# Altium PCB EVB-A32S1-M_PCB.PcbDoc (part 3 of 3)
Units mm, origin at the board's own origin, x right, y up, seen from the top; angles counter-clockwise.
Board outline 134 x 65 mm, 4 copper layers (L1 (Signal), L2 (GND), L3 (PWR), L4 (Signal)), stack 1.614 mm thick; 111 components, 86 nets, 411 pads, 377 vias.
Unrouted connection lines stored in the file: 3.
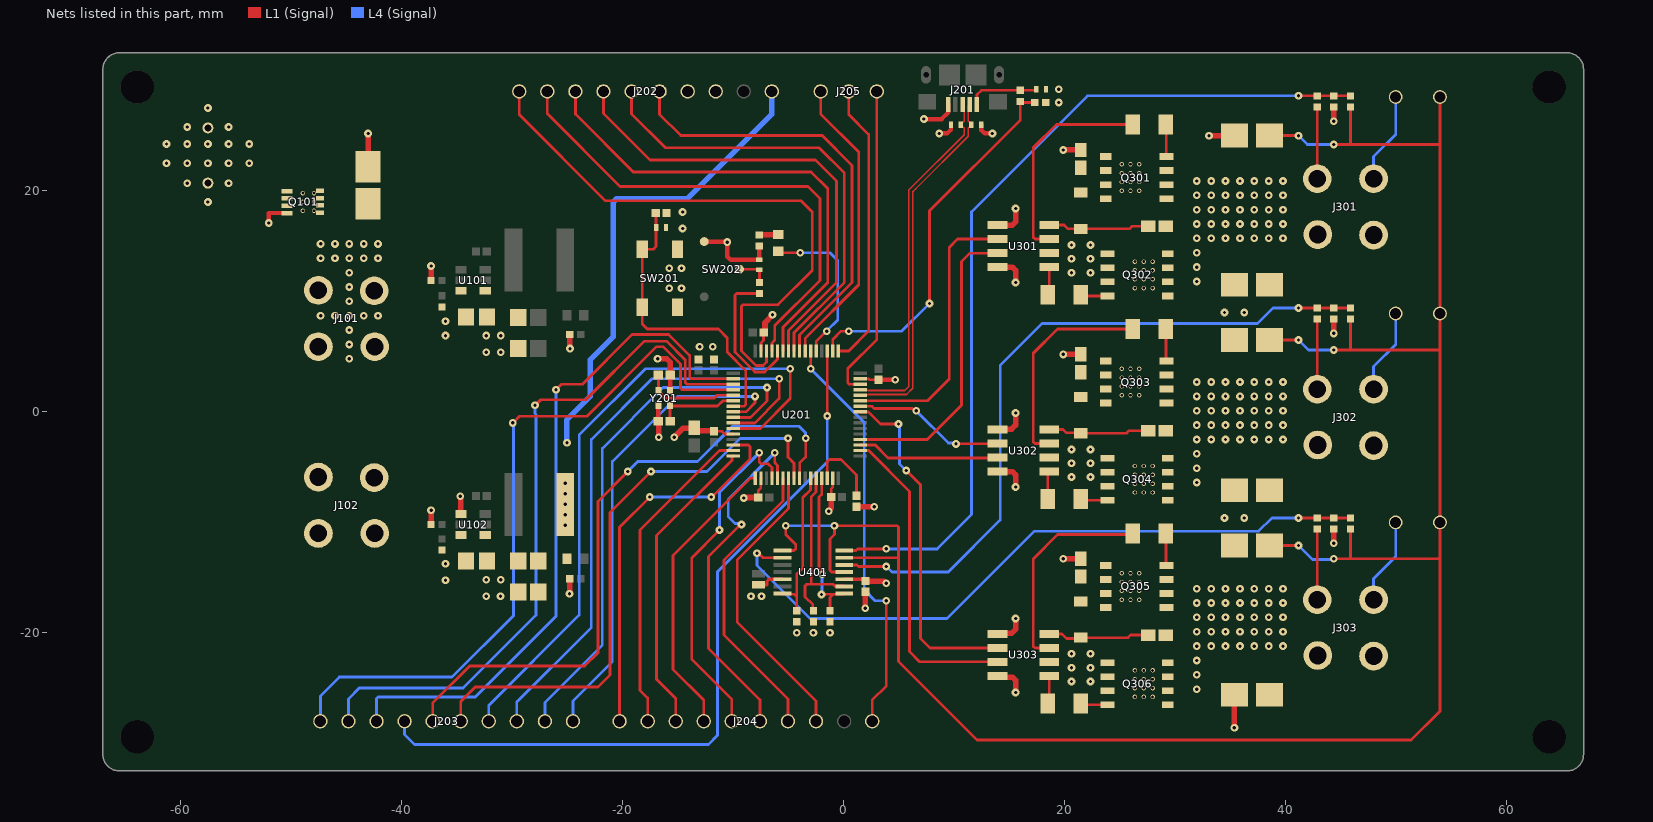
[diagram p4: the nets of this part, all layers, seen from the top]

## Via types
v1: diameter 0.7, hole 0.3, L1 (Signal) to L4 (Signal), tented top, 299 vias
v2: diameter 0.4, hole 0.25, L1 (Signal) to L4 (Signal), tented top, 78 vias

## Nets (pads, with @x,y where several pads share a name; then routed paths per layer and width w, separated by ;. In a path a pad name is that pad's centre, name@x,y a point inside that pad or via, vN(x,y) a via of type N, cw(c..) or ccw(c..) an arc to the next point about the centre after c; other vN are vias at no path point) (continued)
+5V: C107.2 C108.2 C401.2 D102.2 J202.1 L102.2 R401.2 R402.2 R403.2 U102.1 U401.3 | length 49
  L1 (Signal) w0.35: U401.3@0.1,-15.15 2,-15.15 C401.2@2,-15.31
  L1 (Signal) w0.5: v1(-34.671,-7.629) -34.671,-7.683 -34.6,-7.754 -34.6,-9.15 U102.1@-34.6,-9.25 ; C401.2@2,-15.31 3.656,-15.31 3.846,-15.5 v1(3.9,-15.5)
  L4 (Signal) w0.5: v1(-25,-2.8) -25.038,-2.762 -25.038,-0.738 -22.9,1.4 -22.9,4.7 -20.8,6.8 -20.8,19.007 -20.507,19.3 -14.1,19.3 -6.46,26.94 J202.1@-6.46,29
  other v1: -4.2,-20 -2.7,-20 -1.2,-20 -25.15,-10.25 -25.15,-9.3 -25.15,-8.35 -25.15,-7.4 -25.15,-6.45
+VBAT: D103.1 J101.1 J101.2 J101.3 J101.4 Q101.5 Q101.6 Q101.7 Q101.8
  other v1: -44.7,4.8 -44.7,6.1 -44.7,7.4 -47.3,8.7 -46,8.7 -44.7,8.7 -43.4,8.7 -42.1,8.7 -44.7,10 -44.7,11.3 -44.7,12.6 -47.3,13.9 -46,13.9 -44.7,13.9 -43.4,13.9 -42.1,13.9 -47.3,15.2 -46,15.2 -44.7,15.2 -43.4,15.2 -42.1,15.2
  other v2: -48.9,18.2 -47.9,18.2 -48.9,19 -47.9,19 -48.9,19.8 -47.9,19.8
+VCC: C101.2 C105.2 C109.1 C301.2 C303.2 C305.2 D301.2 D302.2 D303.2 Q101.1 Q101.2 Q101.3 Q301.5 Q301.6 Q301.7 Q301.8 Q303.5 Q303.6 Q303.7 Q303.8 Q305.5 Q305.6 Q305.7 Q305.8 R101.2 R104.2 U101.3 U102.3 U301.1 U302.1 U303.1 | length 8.7
  L1 (Signal) w0.5: U303.1@13.96,-20.095 13.998,-20.057 15.232,-20.057 15.6,-19.689 v1(15.6,-18.7) ; U302.1@13.96,-1.595 13.992,-1.563 15.239,-1.563 15.6,-1.202 v1(15.6,-0.1) ; U301.1@13.96,16.905 15.307,16.905 15.6,17.198 v1(15.6,18.4)
  other v1: -36,-15.25 -36,-13.75 -36,6.9 -36,8.2 -57.5,19 -59.375,20.7 -55.625,20.7 -61.25,22.5 -59.375,22.5 -57.5,22.5 -55.625,22.5 -53.75,22.5 -61.25,24.25 -59.375,24.25 -57.5,24.25 -55.625,24.25 -53.75,24.25 -59.375,25.78 -55.625,25.78 -57.5,27.5
  other v2: 25.2,-17 26,-17 26.8,-17 25.2,-16.2 26,-16.2 26.8,-16.2 25.2,-15.4 26,-15.4 26.8,-15.4 25.2,-14.6 26,-14.6 26.8,-14.6 25.2,1.5 26,1.5 26.8,1.5 25.2,2.3 26,2.3 26.8,2.3 25.2,3.1 26,3.1 26.8,3.1 25.2,3.9 26,3.9 26.8,3.9 25.2,20 26,20 26.8,20 25.2,20.8 26,20.8 26.8,20.8 25.2,21.6 26,21.6 26.8,21.6 25.2,22.4 26,22.4 26.8,22.4
BEMF_A: R406.2 R411.2 R412.1 U401.7 | length 78.9
  L1 (Signal) w0.25: U401.7@0.1,-12.55 1.154,-12.55 1.304,-12.4 v1(3.9,-12.4) ; v1(41.2,28.6) R412.1@42.9,28.6 R411.2@44.4,28.6 R406.2@45.9,28.6
  L4 (Signal) w0.25: v1(3.9,-12.4) 8.5,-12.4 11.6,-9.3 11.6,18.1 22.1,28.6 v1(41.2,28.6)
BEMF_B: R407.2 R410.2 R413.1 U401.5 | length 64.2
  L1 (Signal) w0.25: U401.5@0.1,-13.85 1.249,-13.85 1.399,-14 v1(3.9,-14) ; v1(41.2,9.4) R413.1@42.9,9.4 R410.2@44.4,9.4 R407.2@45.9,9.4
  L4 (Signal) w0.25: v1(3.9,-14) 3.925,-14 4.425,-14.5 9.5,-14.5 14.2,-9.8 14.2,4.2 18,8 37.5,8 38.9,9.4 v1(41.2,9.4)
BEMF_C: R408.2 R409.2 R414.1 U401.9 | length 63
  L1 (Signal) w0.25: v1(-7.8,-12.8) -7.678,-12.8 -7.278,-13.2 U401.9@-5.5,-13.2 ; v1(41.2,-9.6) R414.1@42.9,-9.6 ; R414.1@42.9,-9.6 R409.2@44.4,-9.6 R408.2@45.9,-9.6
  L4 (Signal) w0.25: v1(-7.8,-12.8) -7.8,-13.9 -3,-18.7 9.4,-18.7 17.3,-10.8 37.6,-10.8 38.8,-9.6 v1(41.2,-9.6)
BOOT0: R201.2 U201.60 | length 13.3
  L1 (Signal) w0.25: R201.2@-7.588,10.712 -9.654,10.712 -9.8,10.566 -9.8,5.4 -8,3.6 -7.112,3.6 -5.955,4.757 -5.955,5.495 U201.60@-5.95,5.5
COM: D401.1 D402.1 D403.1 R406.1 R407.1 R408.1 TP401.1 TP402.1 TP403.1 U401.4 U401.6 U401.8 | length 201.7
  L1 (Signal) w0.25: U401.8@-5.5,-12.55 -4.446,-12.55 -4.3,-12.404 -4.3,-12 -5.2,-11.1 v1(-5.2,-10.3) ; U401.4@0.1,-14.5 -1.054,-14.5 -1.2,-14.354 -1.2,-11.5 -0.8,-11.1 v1(-0.8,-10.3) 4.854,-10.3 5,-10.446 5,-13.2 5,-22.6 12.1,-29.7 51.4,-29.7 54,-27.1 54,-13.154 ; U401.6@0.1,-13.2 4.854,-13.2 4.954,-13.2 ; D403.1@38.575,-12.1 v1(41.2,-12.1) ; D402.1@38.575,6.5 v1(41.2,6.5) ; D401.1@38.575,25 v1(41.2,25) ; v1(44.4,-13.3) 45.9,-13.3 ; v1(44.4,5.6) 45.9,5.6 ; v1(44.4,24.2) 45.9,24.2 ; R408.1@45.9,-10.6 45.9,-13.3 ; R407.1@45.9,8.4 45.9,5.6 ; R406.1@45.9,27.6 45.9,24.2 ; TP403.1@54,28.5 54,24.2 ; 45.9,-13.3 53.854,-13.3 54,-13.154 ; 45.9,5.6 54,5.6 ; 45.9,24.2 54,24.2 ; 54,-13.154 TP401.1@54,-10 54,5.6 ; 54,5.6 TP402.1@54,8.9 54,24.2
  L4 (Signal) w0.25: v1(-5.2,-10.3) v1(-0.8,-10.3) ; v1(41.2,-12.1) 42.464,-13.364 44.336,-13.364 v1(44.4,-13.3) ; v1(41.2,6.5) 42.1,5.6 v1(44.4,5.6) ; v1(41.2,25) 42,24.2 v1(44.4,24.2)
GHO_A: Q301.4 R301.2 | length 2.9
  L1 (Signal) w0.25: Q301.4@29.235,23.105 R301.2@29.235,26
  L1 (Signal) w0.5: R301.2@29.2,26 R301.2@29.235,26
GHO_B: Q303.4 R303.2 | length 2.9
  L1 (Signal) w0.25: R303.2@29.2,7.5 29.2,4.605 Q303.4@29.235,4.605
GHO_C: Q305.4 R305.2 | length 2.9
  L1 (Signal) w0.25: R305.2@29.2,-11 29.2,-13.86 Q305.4@29.235,-13.895
GLO_A: Q302.4 R302.2 | length 2.5
  L1 (Signal) w0.25: R302.2@21.5,10.495 Q302.4@23.915,10.495
  L1 (Signal) w0.5: R302.2@21.5,10.495 R302.2@21.5,10.6
GLO_B: Q304.4 R304.2 | length 2.5
  L1 (Signal) w0.25: R304.2@21.5,-7.9 21.605,-8.005 Q304.4@23.915,-8.005
GLO_C: Q306.4 R306.2 | length 2.5
  L1 (Signal) w0.25: R306.2@21.5,-26.4 21.605,-26.505 Q306.4@23.915,-26.505
GND: C101.1 C103.1 C104.1 C105.1 C107.1 C108.1 C109.2 C201.1 C202.1 C203.1 C204.1 C205.1 C206.1 C207.1 C208.1 C209.1 C210.1 C211.1 C212.1 C301.1 C303.1 C305.1 C401.1 D103.2 D201.2 D202.2 D204.2 D205.2 D206.2 D304.2 D305.2 D306.2 D401.2 D402.2 D403.2 J102.1 J102.2 J102.3 J102.4 J201.5 J202.3 J202.4 Q101.4 Q302.1 Q302.2 Q302.3 Q304.1 Q304.2 Q304.3 Q306.1 Q306.2 Q306.3 R102.1 R103.1 R105.1 R106.1 R202.1 R203.1 R404.1 R405.1 R409.1 R410.1 R411.1 SW201.3 SW201.4 SW202.1 U101.4 U102.4 U201.12 U201.18 U201.31 U201.47 U201.63 U301.4 U302.4 U303.4 U401.12 Y201.2 Y201.4 | length 79.1
  L1 (Signal) w0.25: C202.1@-11.7,-1.76 -10.965,-1.76 -10.73,-1.995 -9.955,-1.995 U201.12@-9.95,-2 ; C204.1@-7.69,-7.75 -7.69,-7.11 -7.455,-6.875 -7.455,-6.005 U201.18@-7.45,-6 ; U201.63@-7.45,5.5 -7.445,5.505 -7.445,6.243 -7.21,6.478 C205.1@-7.21,7.2 ; C206.1@-1.09,-7.7 -1.09,-6.965 -0.955,-6.83 -0.955,-6.005 U201.31@-0.95,-6 ; U201.47@1.55,3 1.555,2.995 2.293,2.995 2.378,2.91 C207.1@3.2,2.91
  L1 (Signal) w0.3: R404.1@-7.4,-15.65 -6.9,-15.65 -6.9,-15.326 -6.724,-15.15 U401.12@-5.5,-15.15
  L1 (Signal) w0.4: v1(-52,17.1) -52,17.995 Q101.4@-50.335,17.995 ; C211.1@-16.75,-0.85 -16.737,-0.838 -16.737,0.563 Y201.2@-16.725,0.575 ; Y201.4@-15.675,1.925 -15.662,1.937 -15.662,3.338 C210.1@-15.65,3.35 ; SW202.1@-12.588,15.412 -12.563,15.387 v1@-10.513,15.387 ; v1(-10.488,15.362) -10.488,14.055 -10.195,13.762 D202.2@-7.6,13.762 ; R202.1@-7.6,15 D202.2@-7.6,13.762 ; D202.2@-7.588,13.762 D202.2@-7.6,13.762 ; C207.1@3.2,2.91 4.7,2.91 v1(4.7,2.9) ; v1(7.3,26.5) 8.9,26.5 9.5,27.1 J201.5@9.5,27.825 ; v1(8.7,25.2) 9.4,25.2 9.75,25.55 D206.2@9.75,26 ; D205.2@12.5,26 12.5,25.5 12.8,25.2 v1(13.5,25.2)
  L1 (Signal) w0.5: D103.2@-43,22.175 v1(-43,25.2) ; R105.1@-37.3,-10.2 v1(-37.3,-8.9) ; R102.1@-37.3,11.9 v1(-37.3,13.2) ; v1(-24.775,-16.45) -24.762,-16.437 -24.762,-15.112 R106.1@-24.75,-15.1 ; R103.1@-24.75,7 -24.75,5.725 v1(-24.725,5.725) ; v1(-16.8,4.8) -16.793,4.793 -15.968,4.793 -15.675,4.5 -15.675,3.5 -15.65,3.475 C210.1@-15.65,3.35 ; C211.1@-16.75,-0.85 -16.7,-0.9 v1@-16.7,-2.4 ; v1(-15.3,-2.3) -14.482,-1.482 -13.532,-1.482 C201.1@-13.5,-1.45 -13.25,-1.7 -11.76,-1.7 C202.1@-11.7,-1.76 ; v1(-9,-7.8) -9,-7.75 C204.1@-7.69,-7.75 ; C205.1@-7.21,7.2 -7.1,7.31 -7.08,7.31 -7.08,8.066 -6.4,8.746 v1(-6.4,8.8) ; v1(-1.3,-9) -1.3,-8.946 -1.09,-8.736 C206.1@-1.09,-7.7 ; C212.1@1.2,-8.59 2.8,-8.59 v1(2.8,-8.6) ; v1(2,-17.765) C401.1@2,-16.29 ; U303.4@13.96,-23.905 14.07,-24.015 15.307,-24.015 15.6,-24.308 v1(15.6,-25.4) ; U302.4@13.96,-5.405 15.307,-5.405 15.6,-5.698 v1(15.6,-6.8) ; U301.4@13.96,13.095 15.307,13.095 15.6,12.802 v1(15.6,11.7) ; v1(19.9,-13.3) C305.1@21.5,-13.3 ; v1(19.9,5.2) C303.1@21.5,5.2 ; v1(19.9,23.7) C301.1@21.5,23.7 ; v1(33.1,25) D401.2@35.425,25 ; v1(35.4,-28.6) 35.4,-25.625 D306.2@35.425,-25.6 ; v1(44.4,-11.9) R409.1@44.4,-10.6 ; v1(44.4,7.1) R410.1@44.4,8.4 ; v1(44.4,26.3) R411.1@44.4,27.6
  other v1: 22.375,-24.4 22.375,-23.15 22.375,-21.9 -32.3,-16.7 -8.355,-16.7 -7.4,-16.7 -31.02,-16.68 -32.3,-15.2 -31,-15.2 34.5,-9.6 36.3,-9.6 22.375,-5.9 22.375,-4.65 22.375,-3.4 -16.7,-2.3 -32.3,5.4 -31,5.4 -13,5.9 -11.8,5.9 -32.3,6.9 -31,6.9 34.5,9 36.3,9 -15.738,11.188 -14.638,11.188 22.375,12.6 -15.738,12.988 -14.638,12.988 22.375,13.85 22.375,15.1 -14.538,16.588 -14.538,18.088 19.5,28 19.5,29.2
HIN_A: U201.43 U301.2 | length 25.4
  L1 (Signal) w0.25: U201.43@1.55,1 7.6,1 9.6,3 9.6,14.9 10.335,15.635 U301.2@13.96,15.635
HIN_B: U201.42 U302.2 | length 13.8
  L1 (Signal) w0.25: U201.42@1.55,0.5 2.6,0.5 2.8,0.3 6.278,0.3 6.478,0.1 v1(6.6,0.1) ; v1(10.2,-2.9) 10.218,-2.882 13.942,-2.882 U302.2@13.96,-2.865
  L4 (Signal) w0.25: v1(6.6,0.1) 9.514,-2.814 10.114,-2.814 v1(10.2,-2.9)
HIN_C: U201.41 U303.2 | length 31.5
  L1 (Signal) w0.25: U201.41@1.555,-0.005 2.293,-0.005 3.388,-1.1 v1(5,-1.1) ; v1(5.7,-5.3) 7,-6.6 7,-20.5 7.865,-21.365 U303.2@13.96,-21.365
  L4 (Signal) w0.25: v1(5,-1.1) 5.085,-1.185 5.085,-4.713 5.672,-5.3 v1(5.7,-5.3)
HO_A: R301.1 U301.7 | length 19.5
  L1 (Signal) w0.25: U301.7@18.64,15.635 17.365,15.635 17.2,15.8 17.2,23.9 19.3,26 R301.1@26.2,26
HO_B: R303.1 U302.7 | length 19.4
  L1 (Signal) w0.25: U302.7@18.64,-2.865 17.346,-2.865 17.2,-2.719 17.2,5.3 19.4,7.5 R303.1@26.2,7.5
HO_C: R305.1 U303.7 | length 19.1
  L1 (Signal) w0.25: U303.7@18.64,-21.365 17.346,-21.365 17.2,-21.219 17.2,-13.3 19.4,-11.1 R305.1@26,-11.1
LIN_A: U201.36 U301.3 | length 27
  L1 (Signal) w0.25: U201.36@1.55,-2.5 7.6,-2.5 10.7,0.6 10.7,9.7 10.7,13.6 11.465,14.365 U301.3@13.96,14.365
LIN_B: U201.35 U302.3 | length 12.9
  L1 (Signal) w0.25: U201.35@1.55,-3 2.9,-3 4.067,-4.167 13.927,-4.167 U302.3@13.96,-4.135
LIN_C: U201.34 U303.3 | length 28.8
  L1 (Signal) w0.25: U201.34@1.55,-3.5 1.555,-3.505 2.305,-3.505 6,-7.2 6,-21.7 6.917,-22.617 13.942,-22.617 U303.3@13.96,-22.635
LO_A: R302.1 U301.5 | length 2.6
  L1 (Signal) w0.25: R302.1@18.5,10.6 18.64,10.6 U301.5@18.64,13.095
LO_B: R304.1 U302.5 | length 2.6
  L1 (Signal) w0.25: R304.1@18.5,-7.9 18.5,-5.545 U302.5@18.64,-5.405
LO_C: R306.1 U303.5 | length 2.6
  L1 (Signal) w0.25: R306.1@18.5,-26.4 18.64,-26.26 U303.5@18.64,-23.905
NRST: C209.2 D201.1 SW201.1 SW201.2 U201.7 | length 27.3
  L1 (Signal) w0.25: C209.2@-16.978,17.988 -16.938,17.948 D201.1@-16.938,16.688 -16.938,14.962 -17.187,14.713 SW201.2@-18.188,14.713 SW201.1@-18.188,9.463 -18.188,7.946 -17.741,7.5 -11.3,7.5 -10.5,6.7 -10.5,5.4 -8.829,3.729 -8.829,0.646 -8.975,0.5 U201.7@-9.95,0.5
OSC_IN: C210.2 U201.5 Y201.1 | length 8.6
  L1 (Signal) w0.25: C210.2@-16.75,3.35 -16.725,3.325 Y201.1@-16.725,1.925 -16.725,1.875 -16.105,1.255 -11.645,1.255 -11.4,1.5 -11.1,1.5 U201.5@-9.95,1.5
OSC_OUT: C211.2 U201.6 Y201.3 | length 7.4
  L1 (Signal) w0.25: C211.2@-15.65,-0.85 -15.675,-0.825 Y201.3@-15.675,0.575 -15.625,0.525 -11.375,0.525 -10.905,0.995 -9.955,0.995 U201.6@-9.95,1
PA0: J204.1 U201.14 | length 34.6
  L1 (Signal) w0.25: J204.1@-20.24,-28 -20.24,-10.44 v1(-17.5,-7.7) ; v1(-11.935,-7.7) -11.877,-7.7 -8.446,-4.27 -8.446,-3.146 -8.593,-3 U201.14@-9.95,-3
  L4 (Signal) w0.25: v1(-17.5,-7.7) v1(-11.935,-7.7)
PA1: J204.2 U201.15 | length 29
  L1 (Signal) w0.25: J204.2@-17.7,-28 -17.7,-25.9 -18.4,-25.2 -18.4,-10.7 -11.2,-3.5 U201.15@-9.95,-3.5
PA2: J204.3 U201.16 | length 27.7
  L1 (Signal) w0.25: J204.3@-15.16,-28 -15.16,-25.94 -16.9,-24.2 -16.9,-11.2 -10.079,-4.379 -10.079,-4.025 -10.054,-4 U201.16@-9.95,-4
PA3: J204.4 U201.17 | length 26.5
  L1 (Signal) w0.25: J204.4@-12.62,-28 -12.62,-26.08 -15.4,-23.3 -15.4,-13 -8.4,-6 U201.17@-7.95,-6
PA4: J204.5 U201.20 | length 31.4
  L1 (Signal) w0.25: v1(-11.2,-10.7) -13.7,-13.2 -13.7,-22.4 -10.08,-26.02 J204.5@-10.08,-28 ; v1@-7.6,-3.8 -7.6,-4.554 -7.454,-4.7 -6.8,-4.7 -6.455,-5.045 -6.455,-5.995 U201.20@-6.45,-6
  L4 (Signal) w0.25: v1(-11.2,-10.7) -11.2,-7.3 v1(-7.6,-3.7)
PA5: J204.6 U201.21 | length 32.5
  L1 (Signal) w0.25: v1(-9.2,-10.2) -9.3,-10.2 -12.2,-13.1 -12.2,-21.4 -7.54,-26.06 J204.6@-7.54,-28 ; v1(-6.2,-3.7) -6.2,-4.6 -5.95,-4.85 U201.21@-5.95,-6
  L4 (Signal) w0.25: v1(-9.2,-10.2) -9.286,-10.114 -9.786,-10.114 -10.4,-9.5 -10.4,-7.9 v1(-6.2,-3.7)
PA6: J204.7 U201.22 | length 26.6
  L1 (Signal) w0.25: U201.22@-5.45,-6 -5.455,-6.005 -5.455,-8.055 -10.8,-13.4 -10.8,-20.2 -5,-26 J204.7@-5,-28
PA7: J204.8 U201.23 | length 26.9
  L1 (Signal) w0.25: U201.23@-4.945,-5.995 U201.23@-4.95,-6 -4.945,-6.005 -4.945,-8.745 -9.6,-13.4 -9.6,-19.02 -2.46,-26.16 J204.8@-2.46,-28
PB4: J202.5 U201.56 | length 40.2
  L1 (Signal) w0.25: J202.5@-16.62,29 -16.62,26.92 -14.7,25 -1.9,25 0.8,22.3 0.8,11.7 -3.95,6.95 U201.56@-3.95,5.5
PB5: J202.6 U201.57 | length 41.5
  L1 (Signal) w0.25: J202.6@-19.16,29 -19.16,26.96 -16.1,23.9 -2.2,23.9 0.1,21.6 0.1,11.7 -4.445,7.155 -4.445,5.505 U201.57@-4.45,5.5
PB6: J202.7 U201.58 | length 42.8
  L1 (Signal) w0.25: J202.7@-21.7,29 -21.7,27 -17.5,22.8 -2.5,22.8 -0.6,20.9 -0.6,11.7 -4.945,7.355 -4.945,5.505 U201.58@-4.95,5.5
PB7: J202.8 U201.59 | length 44.1
  L1 (Signal) w0.25: J202.8@-24.24,29 -24.24,26.94 -19,21.7 -2.9,21.7 -1.4,20.2 -1.4,11.7 -5.445,7.655 -5.445,5.505 U201.59@-5.45,5.5
PB8: J202.9 U201.61 | length 45.5
  L1 (Signal) w0.25: J202.9@-26.78,29 -26.78,26.98 -20.2,20.4 -3.2,20.4 -2.1,19.3 -2.1,11.9 -6.2,7.8 -6.2,6.488 -6.445,6.243 -6.445,5.505 U201.61@-6.45,5.5
PB9: J202.10 U201.62 | length 53.3
  L1 (Signal) w0.25: J202.10@-29.32,29 -29.32,26.92 -21.5,19.1 -3.8,19.1 -2.8,18.1 -2.8,12.8 -5.9,9.7 -9.054,9.7 -9.2,9.554 -9.2,5.512 -7.888,4.2 -7.246,4.2 -6.95,4.496 U201.62@-6.95,5.5
PC0: J203.1 U201.8 | length 43.2
  L1 (Signal) w0.25: U201.8@-9.95,0 -9.945,0.005 -8.795,0.005 -7.978,0.822 v1(-7.978,1.4)
  L4 (Signal) w0.25: J203.1@-24.46,-28 -24.46,-26.16 -20.9,-22.6 -20.9,-4.5 -15,1.4 v1(-7.978,1.4)
PC1: J203.2 U201.9 | length 48.9
  L1 (Signal) w0.25: U201.9@-9.95,-0.5 -8.4,-0.5 -6.9,1 v1(-6.9,2.2)
  L4 (Signal) w0.25: J203.2@-27,-28 -27,-26.3 -21.8,-21.1 -21.8,-3.3 -16.3,2.2 v1(-6.9,2.2)
PC2: J203.3 U201.10 | length 54.4
  L1 (Signal) w0.25: U201.10@-9.95,-1 -8,-1 -5.8,1.2 v1(-5.8,3)
  L4 (Signal) w0.25: J203.3@-29.54,-28 -29.54,-26.24 -22.8,-19.5 -22.8,-2.5 -17.3,3 v1(-5.8,3)
PC3: J203.4 U201.11 | length 59.8
  L1 (Signal) w0.25: U201.11@-9.95,-1.5 -7.5,-1.5 -4.8,1.2 v1(-4.8,3.9)
  L4 (Signal) w0.25: J203.4@-32.08,-28 -32.08,-26.58 -23.9,-18.4 -23.9,-2.1 -17.9,3.9 v1(-4.8,3.9)
PC4: J203.5 U201.24 | length 53.7
  L1 (Signal) w0.25: J203.5@-34.62,-28 -34.62,-26.22 -33.3,-24.9 -22.2,-24.9 -21.1,-23.8 -21.1,-9.1 v1(-17.4,-5.4) ; v1(-5,-2.4) -5,-4.1 -4.445,-4.655 -4.445,-5.995 U201.24@-4.45,-6
  L4 (Signal) w0.25: v1(-17.4,-5.4) -12.335,-5.4 -9.335,-2.4 v1(-5,-2.4)
PC5: J203.6 U201.25 | length 58.4
  L1 (Signal) w0.25: J203.6@-37.16,-28 -37.16,-26.36 -33.8,-23 -23.4,-23 -22.2,-21.8 -22.2,-8.1 v1(-19.5,-5.4) ; U201.25@-3.95,-6 -3.945,-5.995 -3.945,-4.645 -3.4,-4.1 v1(-3.4,-2.4)
  L4 (Signal) w0.25: v1(-19.5,-5.4) -18.6,-4.5 -13.2,-4.5 -10,-1.3 -4,-1.3 -3.413,-1.887 -3.413,-2.387 v1(-3.4,-2.4)
PC10: J203.7 U201.51 | length 69.1
  L1 (Signal) w0.25: v1(-1.45,-0.38) U201.51@-1.45,5.5
  L4 (Signal) w0.25: J203.7@-39.7,-28 -39.7,-29.2 -38.8,-30.1 -12.2,-30.1 -11.4,-29.3 ; -11.4,-14.5 -1.45,-4.55 v1(-1.45,-0.38) ; -11.39,-29.3 -11.39,-14.5
PC13: J203.8 U201.2 | length 62.8
  L1 (Signal) w0.25: v1(-26,2) -25.5,2.5 -23.6,2.5 -19.1,7 -15.8,7 -13.9,5.1 -13.9,3.146 -13.754,3 U201.2@-9.95,3
  L4 (Signal) w0.25: J203.8@-42.24,-28 -42.24,-25.946 -42.094,-25.8 -33.3,-25.8 -26,-18.5 v1(-26,2)
PC14: J203.9 U201.3 | length 64.4
  L1 (Signal) w0.25: v1(-27.9,0.6) -27.875,0.6 -27.375,1.1 -23.3,1.1 -18,6.4 -16,6.4 -14.3,4.7 -14.3,2.646 -14.154,2.5 U201.3@-9.95,2.5
  L4 (Signal) w0.25: J203.9@-44.78,-28 -44.78,-25.98 -43.8,-25 -34.4,-25 -27.8,-18.4 -27.8,-0.25 -27.9,-0.15 v1(-27.9,0.6)
PC15: J203.10 U201.4 | length 65.9
  L1 (Signal) w0.25: v1(-29.9,-1) -29.3,-0.4 -23.2,-0.4 -16.9,5.9 -16.3,5.9 -14.729,4.329 -14.729,2.146 -14.582,2 U201.4@-9.95,2
  L4 (Signal) w0.25: J203.10@-47.32,-28 -47.32,-25.72 -45.602,-24.002 -35.402,-24.002 -29.85,-18.45 -29.85,-1.05 v1(-29.9,-1)
PD2: J204.10 U201.54 | length 37.5
  L1 (Signal) w0.25: U201.54@-2.95,5.5 -2.95,3.95 v1@-2.9,3.9 ; J204.10@2.62,-28 2.62,-26.08 3.9,-24.8 v1(3.9,-17.1)
  L4 (Signal) w0.25: v1(-2.95,3.9) 1.9,-0.95 1.9,-16.1 2.9,-17.1 v1(3.9,-17.1)
PHASE_A: C302.1 D304.1 J301.1 J301.2 J301.3 J301.4 Q301.1 Q301.2 Q301.3 Q302.5 Q302.6 Q302.7 Q302.8 R412.2 TP301.1 U301.6 | length 14.7
  L1 (Signal) w0.25: J301.4@42.9,21.1 R412.2@42.9,27.6
  L4 (Signal) w0.25: J301.3@48,21.1 48,23.1 50,25.1 TP301.1@50,28.5
  other v1: 32,11.8 20.65,12.6 32,13.1 20.65,13.85 32,14.4 20.65,15.1 32,15.7 33.3,15.7 34.6,15.7 35.9,15.7 37.2,15.7 38.5,15.7 39.8,15.7 32,17 33.3,17 34.6,17 35.9,17 37.2,17 38.5,17 39.8,17 32,18.3 33.3,18.3 34.6,18.3 35.9,18.3 37.2,18.3 38.5,18.3 39.8,18.3 32,19.6 33.3,19.6 34.6,19.6 35.9,19.6 37.2,19.6 38.5,19.6 39.8,19.6 32,20.9 33.3,20.9 34.6,20.9 35.9,20.9 37.2,20.9 38.5,20.9 39.8,20.9
  other v2: 26.4,11.2 27.2,11.2 28,11.2 26.4,12 27.2,12 28,12 26.4,12.8 27.2,12.8 28,12.8 26.4,13.6 27.2,13.6 28,13.6
PHASE_B: C304.1 D305.1 J302.1 J302.2 J302.3 J302.4 Q303.1 Q303.2 Q303.3 Q304.5 Q304.6 Q304.7 Q304.8 R413.2 TP302.1 U302.6 | length 14
  L1 (Signal) w0.25: J302.4@42.9,2.05 R413.2@42.9,8.4
  L4 (Signal) w0.25: J302.3@48,2.05 48,4.1 50,6.1 TP302.1@50,8.9
  other v1: 32,-6.4 20.65,-5.9 32,-5.1 20.65,-4.65 32,-3.8 20.65,-3.4 32,-2.5 33.3,-2.5 34.6,-2.5 35.9,-2.5 37.2,-2.5 38.5,-2.5 39.8,-2.5 32,-1.2 33.3,-1.2 34.6,-1.2 35.9,-1.2 37.2,-1.2 38.5,-1.2 39.8,-1.2 32,0.1 33.3,0.1 34.6,0.1 35.9,0.1 37.2,0.1 38.5,0.1 39.8,0.1 32,1.4 33.3,1.4 34.6,1.4 35.9,1.4 37.2,1.4 38.5,1.4 39.8,1.4 32,2.7 33.3,2.7 34.6,2.7 35.9,2.7 37.2,2.7 38.5,2.7 39.8,2.7
  other v2: 26.4,-7.3 27.2,-7.3 28,-7.3 26.4,-6.5 27.2,-6.5 28,-6.5 26.4,-5.7 27.2,-5.7 28,-5.7 26.4,-4.9 27.2,-4.9 28,-4.9
PHASE_C: C306.1 D306.1 J303.1 J303.2 J303.3 J303.4 Q305.1 Q305.2 Q305.3 Q306.5 Q306.6 Q306.7 Q306.8 R414.2 TP303.1 U303.6 | length 14.2
  L1 (Signal) w0.25: J303.4@42.9,-17 R414.2@42.9,-10.6
  L4 (Signal) w0.25: J303.3@48,-17 48,-15.1 50,-13.1 TP303.1@50,-10
  other v1: 32,-25.1 20.65,-24.4 32,-23.8 20.65,-23.15 32,-22.5 20.65,-21.9 32,-21.2 33.3,-21.2 34.6,-21.2 35.9,-21.2 37.2,-21.2 38.5,-21.2 39.8,-21.2 32,-19.9 33.3,-19.9 34.6,-19.9 35.9,-19.9 37.2,-19.9 38.5,-19.9 39.8,-19.9 32,-18.6 33.3,-18.6 34.6,-18.6 35.9,-18.6 37.2,-18.6 38.5,-18.6 39.8,-18.6 32,-17.3 33.3,-17.3 34.6,-17.3 35.9,-17.3 37.2,-17.3 38.5,-17.3 39.8,-17.3 32,-16 33.3,-16 34.6,-16 35.9,-16 37.2,-16 38.5,-16 39.8,-16
  other v2: 26.4,-25.8 27.2,-25.8 28,-25.8 26.4,-25 27.2,-25 28,-25 26.4,-24.2 27.2,-24.2 28,-24.2 26.4,-23.4 27.2,-23.4 28,-23.4
PROG_LED: D203.2 U201.53 | length 14.8
  L1 (Signal) w0.25: D203.2@-5.9,14.55 -5.75,14.4 v1(-3.9,14.4) ; U201.53@-2.45,5.5 -2.45,6.35 v1(-1.5,7.3)
  L4 (Signal) w0.25: v1(-3.9,14.4) -1.2,14.4 -0.5,13.7 -0.5,8.3 v1(-1.5,7.3)
PROG_LED_K: D203.1 R202.2 | length 1.7
  L1 (Signal) w0.5: R202.2@-7.6,16 -7.575,16.025 -5.925,16.025 D203.1@-5.9,16.05
SENSE_A: R401.1 U201.29 U401.1 | length 14.5
  L1 (Signal) w0.25: v1(-1.965,-16.535) -1.93,-16.5 -0.9,-16.5 ; U201.29@-1.95,-6 -1.955,-6.005 -1.955,-7.478 -2.2,-7.723 -2.2,-14.33 -1.907,-14.624 v1(-1.907,-14.702) ; R401.1@-1.2,-18 -1.2,-17.4 -1.2,-16.8 -0.9,-16.5 ; U401.1@0.1,-16.45 0.05,-16.5 -0.9,-16.5
  L4 (Signal) w0.25: v1(-1.965,-16.535) -1.933,-16.502 -1.933,-14.728 v1(-1.907,-14.702)
SENSE_B: R402.1 U201.28 U401.2 | length 15.9
  L1 (Signal) w0.25: -2.9,-15.5 -2.9,-7.7 -2.455,-7.255 -2.455,-6.005 U201.28@-2.45,-6 ; R402.1@-2.7,-18 -2.754,-17.946 -2.754,-17.446 -3.451,-16.749 -3.451,-15.744 -3.305,-15.598 -2.9,-15.598 -0.915,-15.598 -0.763,-15.75 0.05,-15.75 U401.2@0.1,-15.8
SENSE_C: R403.1 U201.27 U401.14 | length 13.9
  L1 (Signal) w0.25: U401.14@-5.5,-16.45 -5.45,-16.5 -4.446,-16.5 -4.2,-16.746 ; R403.1@-4.2,-18 -4.2,-16.746 ; U201.27@-2.95,-6 -2.955,-6.005 -2.955,-7.055 -3.67,-7.77 -3.67,-14.151 -4.2,-14.681 -4.2,-16.746
SW_BOOT0: D202.1 R201.1 SW202.2 | length 3
  L1 (Signal) w0.25: SW202.2@-9.388,12.912 -7.588,12.912 D202.1@-7.588,12.862 R201.1@-7.588,11.712
SW_CLK: J205.2 U201.49 | length 25.9
  L1 (Signal) w0.25: U201.49@-0.45,5.5 0.5,5.5 2.3,7.3 2.3,25.1 0.5,26.9 J205.2@0.5,29
SW_IO: J205.1 U201.46 | length 28.7
  L1 (Signal) w0.25: U201.46@1.55,2.5 0.546,2.5 0.4,2.646 0.4,3.9 3.04,6.54 J205.1@3.04,29
SW_O: J205.3 U201.55 | length 26.9
  L1 (Signal) w0.25: U201.55@-3.45,5.5 -3.445,5.505 -3.445,6.655 1.4,11.5 1.4,23.52 -2.04,26.96 J205.3@-2.04,29
USB_D_N: D205.1 J201.2 U201.44 | length 33.2
  L1 (Signal) w0.15: U201.44@1.55,1.5 1.605,1.555 2.272,1.555 2.282,1.565 5.732,1.565 6.3,2.133 6.3,19.927 6.545,20.172 11.31,24.937 11.31,25.687 11.398,25.775 11.475,25.775 11.6,25.9 D205.1@11.6,26 11.6,26.1 11.475,26.225 11.398,26.225 11.31,26.313 11.31,26.772 11.31,27.137 11.325,27.152 11.325,27.7 J201.2@11.45,27.825
USB_D_P: D206.1 J201.3 U201.45 | length 32.6
  L1 (Signal) w0.15: U201.45@1.55,2 1.605,1.945 2.272,1.945 2.282,1.935 5.578,1.935 5.93,2.287 5.93,20.08 6.175,20.325 10.94,25.09 10.94,25.687 10.852,25.775 10.775,25.775 10.65,25.9 D206.1@10.65,26 10.65,26.1 10.775,26.225 10.852,26.225 10.94,26.313 10.94,26.925 10.94,27.137 10.925,27.152 10.925,27.7 J201.3@10.8,27.825
VB_A: C302.2 D301.1 U301.8 | length 9.2
  L1 (Signal) w0.25: U301.8@18.64,16.905 19.995,16.905 20.335,16.565 D301.1@21.5,16.565 25.915,16.565 26.15,16.8 C302.2@27.6,16.8
VB_B: C304.2 D302.1 U302.8 | length 9.2
  L1 (Signal) w0.25: U302.8@18.64,-1.595 19.895,-1.595 20.2,-1.9 21.465,-1.9 D302.1@21.5,-1.935 25.635,-1.935 25.87,-1.7 C304.2@27.6,-1.7
VB_C: C306.2 D303.1 U303.8 | length 9.3
  L1 (Signal) w0.25: U303.8@18.64,-20.095 19.795,-20.095 20.2,-20.5 21.435,-20.5 D303.1@21.5,-20.435 25.765,-20.435 26,-20.2 C306.2@27.6,-20.2
VBUS: D204.1 J201.1 R204.2 | length 6.5
  L1 (Signal) w0.25: J201.1@12.1,27.825 12.115,27.84 12.115,28.715 12.5,29.1 R204.2@16.025,29.1 17.45,29.1 D204.1@17.45,29.2
VBUS_SENSE: R203.2 R204.1 U201.50 | length 34.2
  L1 (Signal) w0.25: U201.50@-0.95,5.5 -0.945,5.505 -0.945,6.555 -0.2,7.3 v1(0.5,7.3) ; v1(7.8,9.8) 7.8,18.2 16.025,26.425 R204.1@16.025,28.1 R204.1@16.215,27.91 ; R204.1@16.215,28 R203.2@17.325,28
  L4 (Signal) w0.25: v1(0.5,7.3) 5.3,7.3 v1(7.8,9.8)
VCAP: C212.2 U201.30 | length 6.8
  L1 (Signal) w0.25: U201.30@-1.45,-6 -1.45,-4.496 -1.254,-4.3 -0.2,-4.3 1.21,-5.71 C212.2@1.21,-7.7
pads on no net: J201.4 J201.6 J201.7 J201.8 J201.9 J201.10 J201.11 J204.9 U201.26 U201.33 U201.37 U201.38 U201.39 U201.40 U201.52 U401.13

## Polygon pours and split planes (outlines as drawn)
GND on L1 (Signal) "GND_L01_P030" (solid, pour order 30): -16.238,17.388 -15.364,17.388 -15.364,17.188 -16.238,17.188 -16.238,8.088 -13.738,8.088 -13.738,18.588 -16.238,18.588
GND on L1 (Signal) "GND_L01_P059" (solid, pour order 59): -9,-15.3 -7,-15.3 -7,-17.2 -9,-17.2
+5V on L1 (Signal) "+5V_L01_P057" (solid, pour order 57): -2.121,-18.6 -2.121,-18.873 -1.779,-18.873 -1.779,-18.6 -0.7,-18.6 -0.7,-20.5 -4.7,-20.5 -4.7,-18.6 -3.621,-18.6 -3.621,-18.873 -3.279,-18.873 -3.279,-18.6
GND on L1 (Signal) "GND_L01_P053" (solid, pour order 53): 33.946,-6.967 33.946,-12.227 33.946,-13.4 36.8,-13.4 36.8,-5.9 33.946,-5.9
PHASE_C on L1 (Signal) "PHASE_C_L01_P052" (solid, pour order 52): 17.7,-22.227 17.7,-23.027 20,-23.027 20,-24.927 21.3,-24.927 21.3,-21.427 20,-21.427 20,-22.227
GND on L1 (Signal) "GND_L01_P051" (solid, pour order 51): 24.6,-24.549 23.026,-24.549 23.026,-24.701 24.6,-24.701 24.6,-25.625 23.2,-25.625 23.2,-24.925 21.7,-24.925 21.7,-21.425 23.026,-21.425 23.026,-22.325 24.6,-22.325 24.6,-23.279 23.026,-23.279 23.026,-23.431 24.6,-23.431
+VCC on L1 (Signal) "+VCC_L01_P050" (solid, pour order 50): 21.373,-18.075 21.373,-17.849 21,-17.849 21,-16.475 21.373,-16.475 21.373,-15.775 20.6,-15.775 20.6,-14.075 22.2,-14.075 22.2,-14.742 22.289,-14.742 22.289,-13.741 23.006,-13.741 23.006,-13.375 24.6,-13.375 24.6,-14.429 23.006,-14.429 23.006,-14.575 24.6,-14.575 24.6,-15.675 23.006,-15.675 23.006,-15.851 24.6,-15.851 24.6,-16.969 23.006,-16.969 23.006,-17.135 24.6,-17.135 24.6,-18.075
PHASE_B on L1 (Signal) "PHASE_B_L01_P049" (solid, pour order 49): 17.7,-3.71 17.7,-4.51 20,-4.51 20,-6.41 21.3,-6.41 21.3,-2.91 20,-2.91 20,-3.71
GND on L1 (Signal) "GND_L01_P048" (solid, pour order 48): 24.6,-6.024 24.042,-6.024 24.042,-6.176 24.6,-6.176 24.6,-7.1 23.2,-7.1 23.2,-6.4 21.7,-6.4 21.7,-2.9 23.026,-2.9 23.026,-3.8 24.6,-3.8 24.6,-4.754 24.042,-4.754 24.042,-4.906 24.6,-4.906
+VCC on L1 (Signal) "+VCC_L01_P047" (solid, pour order 47): 24.52,3.894 23.006,3.894 23.006,4.059 24.52,4.059 24.52,5.095 23,5.095 23,4.775 22.3,4.775 22.3,3.725 21.851,3.725 21.851,4.395 20.52,4.395 20.52,2.695 21.35,2.695 21.35,1.995 20.92,1.995 20.92,0.621 21.35,0.621 21.35,0.395 24.52,0.395 24.52,1.335 23.006,1.335 23.006,1.506 24.52,1.506 24.52,2.624 23.006,2.624 23.006,2.795 24.52,2.795
PHASE_A on L1 (Signal) "PHASE_A_L01_P040" (solid, pour order 40): 29.05,11.054 30.144,11.054 30.144,11.212 29.05,11.212 29.05,12.325 30.144,12.325 30.144,12.476 29.05,12.476 29.05,13.6 30.144,13.6 30.144,13.746 29.05,13.746 29.05,16.2 28.5,16.2 28.5,17.4 29.05,17.4 29.05,18.9 28.5,18.9 28.5,19.6 29.1,19.6 29.1,20.2 28.6,20.2 28.6,20.9 29.1,20.9 29.1,21.5 28.6,21.5 28.6,22.2 50.7,22.2 50.61,14.525 33.4,14.525 33.4,10.1 29.05,10.1
PHASE_C on L1 (Signal) "PHASE_C_L01_P046" (solid, pour order 46): 37.3,-22.6 37.3,-26.7 39.8,-26.7 39.8,-22.6 50.609,-22.6 50.699,-14.9 28.6,-14.9 28.6,-15.525 29.1,-15.525 29.1,-16.125 28.6,-16.125 28.6,-16.825 29.1,-16.825 29.1,-17.425 28.5,-17.425 28.5,-18.125 29.05,-18.125 29.05,-19.625 28.5,-19.625 28.5,-20.825 29.05,-20.825 29.05,-23.279 30.144,-23.279 30.144,-23.425 29.05,-23.425 29.05,-24.549 30.144,-24.549 30.144,-24.7 29.05,-24.7 29.05,-25.813 30.144,-25.813 30.144,-25.971 29.05,-25.971 29.05,-27 33.4,-27 33.4,-22.6
PHASE_B on L1 (Signal) "PHASE_B_L01_P045" (solid, pour order 45): 37.3,-4 37.3,-8.2 39.8,-8.2 39.8,-4 50.61,-4 50.701,3.8 28.6,3.8 28.6,2.975 29.1,2.975 29.1,2.375 28.6,2.375 28.6,1.675 29.1,1.675 29.1,1.075 28.5,1.075 28.5,0.375 29.05,0.375 29.05,-1.125 28.5,-1.125 28.5,-2.325 29.05,-2.325 29.05,-4.779 30.144,-4.779 30.144,-4.925 29.05,-4.925 29.05,-6.049 30.144,-6.049 30.144,-6.2 29.05,-6.2 29.05,-7.312 30.144,-7.312 30.144,-7.471 29.05,-7.471 29.05,-8.425 33.4,-8.425 33.4,-4
PHASE_A on L1 (Signal) "PHASE_A_L01_P044" (solid, pour order 44): 17.7,14.8 17.7,14 20,14 20,12.1 21.3,12.1 21.3,15.6 20,15.6 20,14.8
+VCC on L1 (Signal) "+VCC_L01_P036" (solid, pour order 36): 21.373,18.9 21.373,19.126 21,19.126 21,20.5 21.373,20.5 21.373,21.2 20.6,21.2 20.6,22.9 22.2,22.9 22.2,22.233 22.289,22.233 22.289,23.234 23.006,23.234 23.006,23.6 24.6,23.6 24.6,22.546 23.006,22.546 23.006,22.4 24.6,22.4 24.6,21.3 23.006,21.3 23.006,21.124 24.6,21.124 24.6,20.006 23.006,20.006 23.006,19.84 24.6,19.84 24.6,18.9
GND on L1 (Signal) "GND_L01_P042" (solid, pour order 42): 24.6,12.476 24.042,12.476 24.042,12.324 24.6,12.324 24.6,11.4 23.2,11.4 23.2,12.1 21.7,12.1 21.7,15.6 23.026,15.6 23.026,14.7 24.6,14.7 24.6,13.746 24.042,13.746 24.042,13.594 24.6,13.594
PHASE_A on L1 (Signal) "PHASE_A_L01_P041" (solid, pour order 41): 37.3,10.4 39.8,10.4 39.8,14.7 37.3,14.7
GND on L1 (Signal) "GND_L01_P038" (solid, pour order 38): 33.946,11.633 33.946,6.373 33.946,5.2 36.8,5.2 36.8,12.7 33.946,12.7
GND on L1 (Signal) "GND_L01_P034" (solid, pour order 34): 18,28.579 18.9,28.579 18.9,28.8 18,28.8 18,29.7 20,29.7 20,27.5 18,27.5
GND on L1 (Signal) "GND_L01_P019" (solid, pour order 19): -13.5,4.6 -11.3,4.6 -11.3,6.4 -13.5,6.4
5V_BUCK_SW on L1 (Signal) "5V_BUCK_SW_L01_P018" (solid, pour order 18): -31.625,-8.64 -31.625,-8.1 -31.85,-8.1 -32.75,-8.1 -32.75,-7.2 -28.85,-7.2 -28.85,-10.6 -32.95,-10.6 -32.95,-9.8 -31.85,-9.8 -31.85,-8.64
+5V on L1 (Signal) "+5V_L01_P017" (solid, pour order 17): -26.292,-11.506 -26.59,-11.506 -26.59,-12.471 -26.684,-12.471 -26.684,-12.505 -27.863,-12.505 -27.863,-17.33 -25.679,-17.33 -25.679,-13.98 -24.488,-13.98 -24.488,-11.33 -24.088,-11.33 -24.088,-5.33 -26.292,-5.33
GND on L1 (Signal) "GND_L01_P016" (solid, pour order 16): -31.554,-11.75 -29.133,-11.75 -29.133,-17.35 -32.908,-17.35 -32.908,-10.8 -31.554,-10.8
+VCC on L1 (Signal) "+VCC_L01_P015" (solid, pour order 15): -35.771,-12.272 -35.771,-11.75 -35.15,-11.75 -35.15,-10.872 -33.35,-10.872 -33.35,-14.601 -35.125,-14.601 -35.125,-15.922 -36.8,-15.922 -36.8,-12.272
+VCC on L1 (Signal) "+VCC_L01_P008" (solid, pour order 8): -35.721,9.9 -35.721,10.346 -35.1,10.346 -35.1,11.3 -33.3,11.3 -33.3,7.571 -35.129,7.571 -35.129,6.25 -36.75,6.25 -36.75,9.9
3V3_BUCK_SW on L1 (Signal) "3V3_BUCK_SW_L01_P014" (solid, pour order 14): -31.8,13.886 -31.64,13.886 -31.64,13.46 -31.8,13.46 -31.8,12.3 -32.9,12.3 -32.9,11.5 -28.8,11.5 -28.8,14.9 -32.7,14.9 -32.7,14 -31.8,14
+3V3 on L1 (Signal) "+3V3_L01_P010" (solid, pour order 10): -26.596,9.575 -26.596,10.646 -26.204,10.646 -26.204,16.75 -24,16.75 -24,10.75 -24.4,10.75 -24.4,8.1 -25.675,8.1 -25.675,4.75 -27.775,4.75 -27.775,9.575
GND on L1 (Signal) "GND_L01_P009" (solid, pour order 9): -31.646,10.35 -29.225,10.35 -29.225,4.75 -33,4.75 -33,11.3 -31.646,11.3
+VCC on L1 (Signal) "+VCC_L01_P007" (solid, pour order 7): -49.8,20.2 -56.4,20.2 -56.4,18.5 -49.8,18.5
+VCC on L1 (Signal) "+VCC_L01_P006" (solid, pour order 6): -57.5,18.2 cw(c-57.5,23.2) -62.5,23.2 cw(c-57.5,23.2) -57.5,28.2 cw(c-57.5,23.2) -52.5,23.2 cw(c-57.5,23.2)
+VBAT on L1 (Signal) "+VBAT_L01_P000" (solid, pour order 0): -49.25,20.25 -49.25,3.25 -40.6,3.25 -40.6,20.25
PHASE_C on L4 (Signal) "PHASE_C_L04_P056" (solid, pour order 56): 28.6,-14.9 28.6,-19.3 20,-19.3 20,-27 33.4,-27 33.4,-22.6 40.9,-22.6 40.9,-14.9 33.4,-14.9
PHASE_B on L4 (Signal) "PHASE_B_L04_P055" (solid, pour order 55): 28.6,3.8 28.6,-0.6 20,-0.6 20,-8.3 33.4,-8.3 33.4,-3.9 40.9,-3.9 40.9,3.8 33.4,3.8
PHASE_A on L4 (Signal) "PHASE_A_L04_P054" (solid, pour order 54): 28.6,22.2 28.6,17.8 20,17.8 20,10.1 33.4,10.1 33.4,14.5 40.9,14.5 40.9,22.2 33.4,22.2
+3V3 on L3 (PWR) (split plane): 4.898,17 4.898,12.5 4.898,-10.398 -11.398,-10.398 -11.398,-7 -11.406,-6.961 -11.428,-6.928 -11.461,-6.906 -11.5,-6.898 -18.898,-6.898 -18.898,0.25 -18.906,0.289 -18.928,0.322 -18.961,0.344 -19,0.352 -30.898,0.352 -30.898,9.75 -30.906,9.789 -30.928,9.822 -30.961,9.844 -31,9.852 -35.898,9.852 -35.898,20.398 4.898,20.398
+5V on L3 (PWR) (split plane): -19.102,-7 -19.094,-7.039 -19.072,-7.072 -19.039,-7.094 -19,-7.102 -11.602,-7.102 -11.602,-10.5 -11.594,-10.539 -11.572,-10.572 -11.539,-10.594 -11.5,-10.602 4.898,-10.602 4.898,-11 4.898,-22.898 -30.648,-22.898 -30.648,-12.5 -30.656,-12.461 -30.678,-12.428 -30.711,-12.406 -30.75,-12.398 -35.898,-12.398 -35.898,-4.852 -31,-4.852 -30.961,-4.844 -30.928,-4.822 -30.906,-4.789 -30.898,-4.75 -30.898,0.148 -19.102,0.148
+VBAT on L3 (PWR) (split plane): -39.202,2.002 -50.798,2.002 -50.798,17.8 -50.798,21.498 -39.202,21.498
+VBAT on L3 (PWR) (split plane): 65.629,31.983 65.757,31.958 65.879,31.916 65.996,31.859 66.104,31.787 66.201,31.701 66.287,31.604 66.359,31.496 66.416,31.379 66.458,31.257 66.483,31.129 66.491,31.012 66.49,31 66.49,-31 66.491,-31.012 66.483,-31.129 66.458,-31.257 66.416,-31.379 66.359,-31.496 66.287,-31.604 66.201,-31.701 66.104,-31.787 65.996,-31.859 65.879,-31.916 65.757,-31.958 65.629,-31.983 65.512,-31.991 65.5,-31.99 -65.5,-31.99 -65.512,-31.991 -65.629,-31.983 -65.757,-31.958 -65.879,-31.916 -65.996,-31.859 -66.104,-31.787 -66.201,-31.701 -66.287,-31.604 -66.359,-31.496 -66.416,-31.379 -66.458,-31.257 -66.483,-31.129 -66.491,-31.012 -66.49,-31 -66.49,31 -66.491,31.012 -66.483,31.129 -66.458,31.257 -66.416,31.379 -66.359,31.496 -66.287,31.604 -66.201,31.701 -66.104,31.787 -65.996,31.859 -65.879,31.916 -65.757,31.958 -65.629,31.983 -65.512,31.991 -65.5,31.99 65.5,31.99 65.512,31.991
GND on L2 (GND) (split plane): 65.629,31.983 65.757,31.958 65.879,31.916 65.996,31.859 66.104,31.787 66.201,31.701 66.287,31.604 66.359,31.496 66.416,31.379 66.458,31.257 66.483,31.129 66.491,31.012 66.49,31 66.49,-31 66.491,-31.012 66.483,-31.129 66.458,-31.257 66.416,-31.379 66.359,-31.496 66.287,-31.604 66.201,-31.701 66.104,-31.787 65.996,-31.859 65.879,-31.916 65.757,-31.958 65.629,-31.983 65.512,-31.991 65.5,-31.99 -65.5,-31.99 -65.512,-31.991 -65.629,-31.983 -65.757,-31.958 -65.879,-31.916 -65.996,-31.859 -66.104,-31.787 -66.201,-31.701 -66.287,-31.604 -66.359,-31.496 -66.416,-31.379 -66.458,-31.257 -66.483,-31.129 -66.491,-31.012 -66.49,-31 -66.49,31 -66.491,31.012 -66.483,31.129 -66.458,31.257 -66.416,31.379 -66.359,31.496 -66.287,31.604 -66.201,31.701 -66.104,31.787 -65.996,31.859 -65.879,31.916 -65.757,31.958 -65.629,31.983 -65.512,31.991 -65.5,31.99 65.5,31.99 65.512,31.991

## Other copper
L3 (PWR) (plane layer: these items are gaps in the copper):
  lines w0.2: -31,0.25 -31,-4.75 -36,-4.75 -36,-12.5 -30.75,-12.5 -30.75,-23 -13.5,-23 5,-23 5,-11 5,-10.5 ; -31,0.25 -19,0.25 -19,-7 -11.5,-7 -11.5,-10.5 5,-10.5 ; -31,0.25 -31,9.75 -36,9.75 -36,20.5 5,20.5 5,17 5,12.5 5,-10.5 ; -50.9,1.9 -50.9,17.8 -50.9,21.6 -39.1,21.6 -39.1,1.9 -50.9,1.9

## Silkscreen, mask and mechanical layers (free items; w line width, h text height)
Mechanical 1:
  the board outline again, w0.1